# Altium PCB board.PcbDoc
Units mil, origin at the board's own origin, x right, y up, seen from the top; angles counter-clockwise.
Board outline 2755.91 x 2362.2 mil, 2 copper layers (Top Layer, Bottom Layer); 91 components, 155 nets, 498 pads, 238 vias.
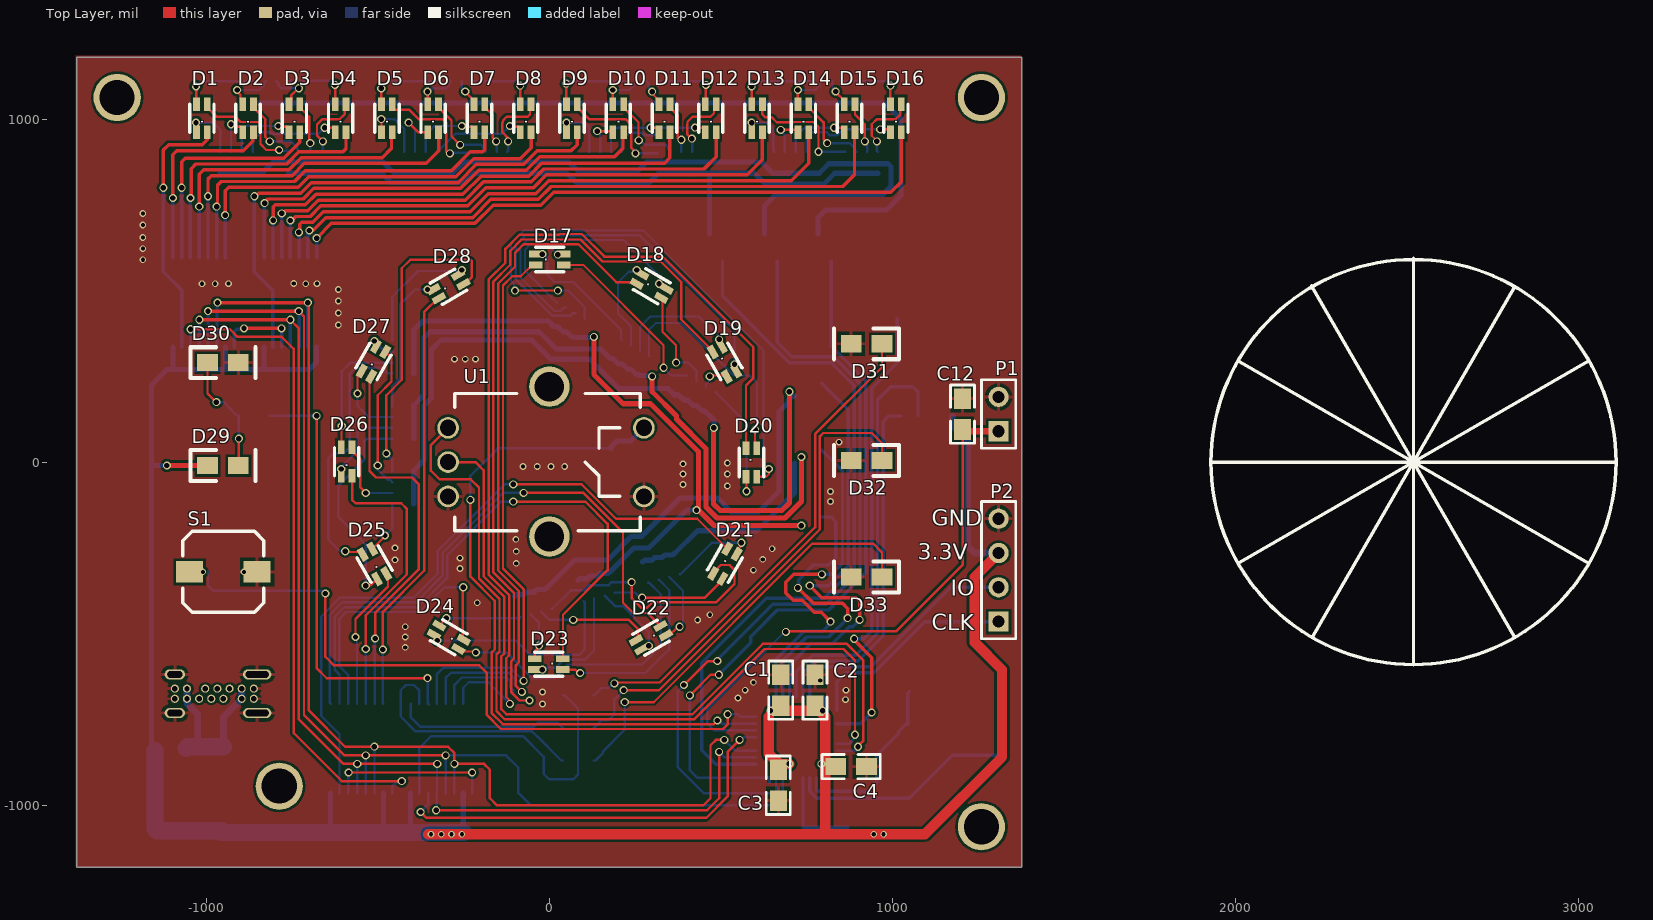
[diagram p0: Top Layer view]
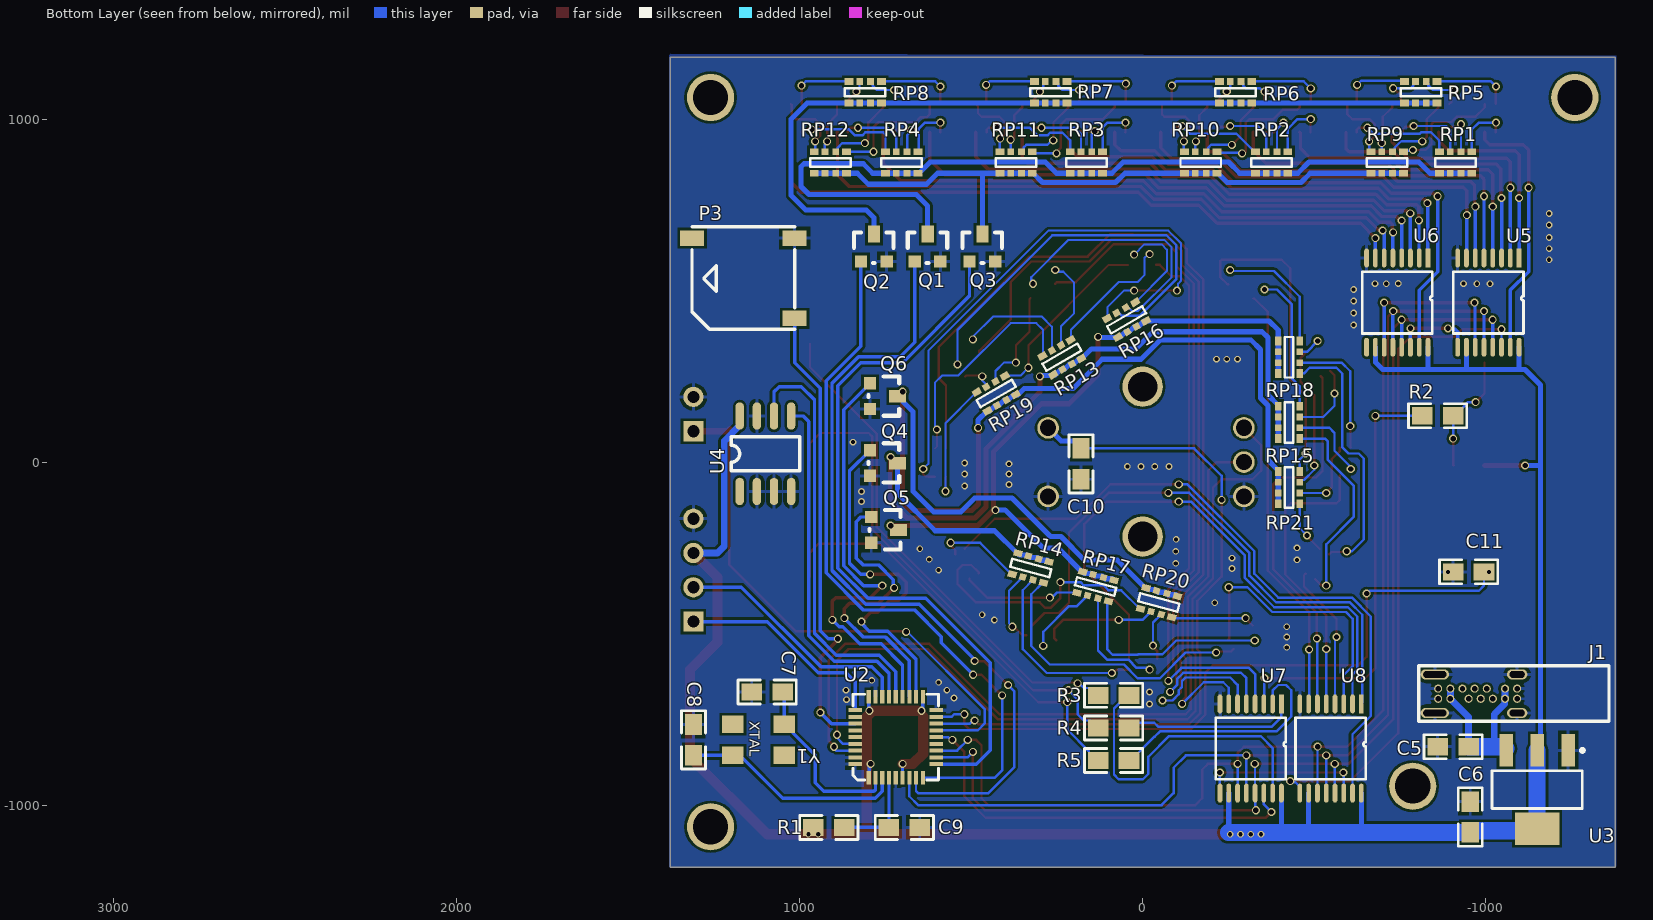
[diagram p1: Bottom Layer view, seen from below]

## Layer stack, top to bottom
Top Solder: solder mask 0.4, Solder Resist, Dk 3.5
Top Layer: signal copper 1.4
Dielectric 1: dielectric 12.6, FR-4, Dk 4.8
Bottom Layer: signal copper 1.4
Bottom Solder: solder mask 0.4, Solder Resist, Dk 3.5

## Board outline
-1377.95,-1181.1 -1377.95,1181.1 1377.95,1181.1 1377.95,-1181.1

## Design rules (kind name [scope] priority, off if disabled: settings)
Clearance [All] p1: gap=7 ignorepadtopadclearanceinfootprint=FALSE
ComponentClearance [All] p1: gap=0 collisioncheckmode=3 verticalgap=0 showdistances=FALSE
PlaneConnect [All] p1: pad.planeconnectstyle=Relief pad.reliefexpansion=20 pad.reliefentries=4 pad.reliefconductorwidth=10 pad.reliefairgap=10 via.planeconnectstyle=Direct via.reliefexpansion=20 via.reliefentries=4 via.reliefconductorwidth=10 via.reliefairgap=10
PolygonConnect [All] p1: thpad.connectstyle=Relief thpad.reliefconductorwidth=10 thpad.reliefentries=4 thpad.polygonreliefangle="90 Angle" thpad.airgapwidth=10 smdpad.connectstyle=Relief smdpad.reliefconductorwidth=10 smdpad.reliefentries=4 smdpad.polygonreliefangle="90 Angle" smdpad.airgapwidth=10 via.connectstyle=Direct via.reliefconductorwidth=10 via.reliefentries=4 via.polygonreliefangle="90 Angle" via.airgapwidth=10
RoutingVias [All] p1: holewidth=15.75 width=23.62 viastyle="Through Hole" minholewidth=15.75 minwidth=23.62 maxholewidth=157.48 maxwidth=236.22
SolderMaskExpansion [All] p1: expansion=4
Width [All] p1: maxlimit=100 minlimit=5 preferedwidth=6
28 further rules are at their usual default settings.

## Components (designator, comment, footprint, x,y, rotation, side; value= is the part's Value field where it differs from the comment)
C1 "Cap" 0805 675,-620 r270 top value=104
C2 "Cap" 0805 774.68,-620 r270 top value=104
C3 "Cap" 0805 667.82,-987.18 r90 top value=104
C4 "Cap" 0805 925,-887.83 r180 top value=104
C5 "Cap" 0805 -860,-829.68 r180 bottom value=104
C6 "Cap" 0805 -955,-989.68 r270 bottom value=104
C7 "Cap" 0805 1140,-670 r180 bottom value=22
C8 "Cap" 0805 1310,-765 r270 bottom value=22
C9 "Cap" 0805 650,-1065 r0 bottom value=104
C10 "Cap" 0805 180,-50 r90 bottom value=104
C11 "Cap" 0805 -905,-320 r180 bottom value=104
C12 "Cap" 0805 1205,185 r270 top value=104
D1 "RGB_LED" 0805_RGB -1028.79,961.38 r90 top
D2 "RGB_LED" 0805_RGB -893.89,961.38 r90 top
D3 "RGB_LED" 0805_RGB -758.99,961.38 r90 top
D4 "RGB_LED" 0805_RGB -624.09,961.38 r90 top
D5 "RGB_LED" 0805_RGB -489.19,961.38 r90 top
D6 "RGB_LED" 0805_RGB -354.29,961.38 r90 top
D7 "RGB_LED" 0805_RGB -219.39,961.38 r90 top
D8 "RGB_LED" 0805_RGB -84.49,961.38 r90 top
D9 "RGB_LED" 0805_RGB 50.41,961.38 r90 top
D10 "RGB_LED" 0805_RGB 185.31,961.38 r90 top
D11 "RGB_LED" 0805_RGB 320.21,961.38 r90 top
D12 "RGB_LED" 0805_RGB 455.11,961.38 r90 top
D13 "RGB_LED" 0805_RGB 590.01,961.38 r90 top
D14 "RGB_LED" 0805_RGB 724.91,961.38 r90 top
D15 "RGB_LED" 0805_RGB 859.81,961.38 r90 top
D16 "RGB_LED" 0805_RGB 994.71,961.38 r90 top
D17 "RGB_LED" 0805_RGB -40,606.5 r0 top
D18 "RGB_LED" 0805_RGB 270.75,547.28 r330 top
D19 "RGB_LED" 0805_RGB 503.66,336.6 r300 top
D20 "RGB_LED" 0805_RGB 605,40 r270 top
D21 "RGB_LED" 0805_RGB 546.34,-268.4 r240 top
D22 "RGB_LED" 0805_RGB 340,-505 r210 top
D23 "RGB_LED" 0805_RGB 40,-605 r180 top
D24 "RGB_LED" 0805_RGB -265,-545 r150 top
D25 "RGB_LED" 0805_RGB -502.28,-340.75 r120 top
D26 "RGB_LED" 0805_RGB -606.5,-40 r90 top
D27 "RGB_LED" 0805_RGB -546.6,265.75 r60 top
D28 "RGB_LED" 0805_RGB -337.35,504.44 r30 top
D29 "X1" 0805_LED -996.5,-10 r0 top
D30 "X5" 0805_LED -996.5,290 r0 top
D31 "Hour" 0805_LED 970,345 r180 top
D32 "Minute" 0805_LED 970,5 r180 top
D33 "Second" 0805_LED 970,-335 r180 top
J1 "USBC_Basic" USBC_BS -851.57,-731.54 r90 bottom
P1 "TopButton" HDR1X2 1310,90 r90 top
P2 "SWD" HDR1X4 1310,-465 r90 top
P3 "Buzzer" BUZZER_SMT 1015,418.8 r0 bottom
Q1 "AO3400" SOT-23 665,585 r180 bottom
Q2 "AO3400" SOT-23 821.55,585 r180 bottom
Q3 "AO3400" SOT-23 505,585 r180 bottom
Q4 "AO3400" SOT-23 795,35 r270 bottom
Q5 "AO3400" SOT-23 791.57,-160 r270 bottom
Q6 "AO3400" SOT-23 795,230 r270 bottom
R1 "Res1" 0805 870,-1065 r0 bottom value=10K
R2 "Res1" 0805 -815,135 r180 bottom value=1K
R3 "Res1" 0805 40,-680 r0 bottom value=1K
R4 "Res1" 0805 40,-775 r0 bottom value=1K
R5 "Res1" 0805 40,-870 r0 bottom value=1K
RP1 "1K*4" 0603x4 -959.49,842.01 r0 bottom
RP2 "1K*4" 0603x4 -422.99,842.01 r0 bottom
RP3 "1K*4" 0603x4 117.01,842.01 r0 bottom
RP4 "1K*4" 0603x4 655.51,842.01 r0 bottom
RP5 "1K*4" 0603x4 -857.99,1047.01 r0 bottom
RP6 "1K*4" 0603x4 -317.99,1047.01 r0 bottom
RP7 "1K*4" 0603x4 221.16,1047.01 r0 bottom
RP8 "1K*4" 0603x4 762.01,1047.01 r0 bottom
RP9 "1K*4" 0603x4 -760,842.01 r0 bottom
RP10 "1K*4" 0603x4 -216.5,842.01 r0 bottom
RP11 "1K*4" 0603x4 322.01,842.01 r0 bottom
RP12 "1K*4" 0603x4 863.5,842.01 r0 bottom
RP13 "1K*4" 0603X4 178.95,301.94 r330 bottom
RP14 "1K*4" 0603X4 363.96,-266 r195 bottom
RP15 "1K*4" 0603X4 -394.96,68.5 r90 bottom
RP16 "1K*4" 0603X4 -9.55,411.5 r330 bottom
RP17 "1K*4" 0603X4 175,-320 r195 bottom
RP18 "1K*4" 0603X4 -395,258.5 r90 bottom
RP19 "1K*4" 0603X4 370.45,196.5 r330 bottom
RP20 "1K*4" 0603X4 -9.58,-366.85 r195 bottom
RP21 "1K*4" 0603X4 -395,-121.5 r90 bottom
S1 "SW-PB" SW_PB_665 -950,-320 r0 top
U1 "EC11" EC11 -295,100 r0 top locked
U2 "STM32F103T8U6" QFN36 798.74,-912.91 r90 bottom
U3 "1117" SOT-223 -1150,-954.68 r270 bottom
U4 "AT24C04C" SO-08 1175,-85.56 r90 bottom
U5 "74HC595" TSSOP16 -1097.36,595 r270 bottom
U6 "74HC595" TSSOP16 -831.77,595 r270 bottom
U7 "74HC595" TSSOP16 -404.45,-705 r270 bottom
U8 "74HC595" TSSOP16 -637.36,-705 r270 bottom
Y1 "XTAL" XTAL-5 1045.39,-855 r0 bottom

## Footprints (in the part's own frame and the unit in brackets; to place one, negate y for a bottom-side part, rotate by r counter-clockwise, add the part's x,y. Pads: shape width x height; smd on the part's side, far side on the other; paste and mask are expansions set on the pad)
0603x4 [mm]
  rect 0.65x0.5 smd: 1(0,0) 4(2.4,0) 5(2.4,-1.6) 8(0,-1.6)
  rect 0.5x0.5 smd: 2(0.8,0) 3(1.6,0) 6(1.6,-1.6) 7(0.8,-1.6)
  silkscreen extent -0.3,-1.1 2.7,-0.5
0603X4 [mm]
  rect 0.65x0.5 smd: 1(0,0) 4(2.4,0) 5(2.4,-1.6) 8(0,-1.6)
  rect 0.5x0.5 smd: 2(0.8,0) 3(1.6,0) 6(1.6,-1.6) 7(0.8,-1.6)
  silkscreen extent -0.3,-1.1 2.7,-0.5
0805 [mil]
  rect 60x50 smd: 1(0,0) 2(90,0)
  silkscreen extent -40,-35 130,35
0805_LED [mil]
  rect 60x50 smd: 1(0,0) 2(90,0)
  silkscreen extent -50,-45 140,45
0805_RGB [mm]
  rect 1x0.5 smd: B(2.1,-0.8) COM(0,-0.8) G(2.1,0) R(0,0)
  silkscreen extent 0,-1.3 2.1,0.5
BUZZER_SMT [mm] "Surface-mount buzzer with sound port on the side"
  rect 1.78x1.15 smd: 0(7.59,-5.95) 1(0,0) 2(0,-5.95)
  silkscreen extent 0,-6.8 7.6,0.8
EC11 [mm]
  round 3 hole 2.2: 0(7.5,-8.05) 0(7.5,3.05)
  round 1.6 hole 1.2: 1(0,0) 2(0,-2.54) 3(0,-5.08) 4(14.5,0) 5(14.5,-5.08)
  silkscreen extent 0.51,-7.62 14.22,2.54
HDR1X2 [mm] "Connector; Header; 2 Position"
  rect 1.5x1.5 hole 0.9: 1(0,0)
  round 1.5 hole 0.9: 2(2.54,0)
  silkscreen extent -1.27,-1.27 3.81,1.27
HDR1X4 [mm] "Connector; Header; 4 Position"
  rect 1.5x1.5 hole 0.9: 1(0,0)
  round 1.5 hole 0.9: 2(2.54,0) 3(5.08,0) 4(7.62,0)
  silkscreen extent -1.27,-1.27 8.89,1.27
QFN36 [mm]
  rect 1x0.3 smd: 1(-0.18,0) 2(-0.18,-0.5) 3(-0.18,-1) 4(-0.18,-1.5) 5(-0.18,-2) 6(-0.18,-2.5) 7(-0.18,-3) 8(-0.18,-3.5) 9(-0.18,-4) 19(5.82,-4) 20(5.82,-3.5) 21(5.82,-3) 22(5.82,-2.5) 23(5.82,-2) 24(5.82,-1.5) 25(5.82,-1) 26(5.82,-0.5) 27(5.82,0)
  rect 0.3x1 smd: 10(0.82,-5) 11(1.32,-5) 12(1.82,-5) 13(2.32,-5) 14(2.82,-5) 15(3.32,-5) 16(3.82,-5) 17(4.32,-5) 18(4.82,-5) 28(4.82,1) 29(4.32,1) 30(3.82,1) 31(3.32,1) 32(2.82,1) 33(2.32,1) 34(1.82,1) 35(1.32,1) 36(0.82,1)
  silkscreen extent -0.35,-5.17 5.99,1.17
SO-08 [mil]
  oval 80x24 smd: 1(0,0) 2(0,-50) 3(0,-100) 4(0,-150) 5(220,-150) 6(220,-100) 7(220,-50) 8(220,0)
  silkscreen extent 60,-175 160,25
SOT-23 [mil]
  rect 36x36 smd: 1(0,0) 2(75,0)
  rect 36x50 smd: 3(38,80)
  silkscreen extent -20,-5 95,85
SOT-223 [mm] "SOT223, 4-Leads, Body 6.5x3.5mm, Pitch 2.3mm, Lead Span 7mm, IPC Medium Density"
  rect 2.4x1 smd: 1(-2.9,2.3) 2(-2.9,0) 3(-2.9,-2.3)
  rect 2.4x3.3 smd: 2(2.9,0)
  silkscreen extent -3.02,-3.35 1.4,3.47, body extent -1.85,-3.35 1.85,3.35, height 1.7
SW_PB_665 [mm]
  rect 2x1.6 smd: 1(-2.5,0) 2(2.5,0)
  silkscreen extent -3,-3 3,3
TSSOP16 [mm]
  rect 1.4x0.35 smd: 1(0,0)
  oval 1.4x0.35 smd: 2(0,-0.65) 3(0,-1.3) 4(0,-1.95) 5(0,-2.6) 6(0,-3.25) 7(0,-3.9) 8(0,-4.55) 9(6.604,-4.55) 10(6.604,-3.9) 11(6.604,-3.25) 12(6.604,-2.6) 13(6.604,-1.95) 14(6.604,-1.3) 15(6.604,-0.65) 16(6.604,0)
  silkscreen extent 1.02,-4.88 5.59,0.33
USBC_BS [mm] "USB Type-C QCharge Side-Mount"
  oval 0.75x1.5 hole 0.5 slot 1.1 at 90 deg: 0(0,-6.1) 0(2.86,-6.1)
  oval 0.75x2.1 hole 0.5 slot 1.7 at 90 deg: 0(0,0) 0(2.86,0)
  round 0.6 hole 0.4: A1(1.805,-0.25) A4(1.805,-1.15) A5(1.805,-2.05) A6(1.805,-2.95) A7(1.805,-3.85) A9(1.805,-5.2) A12(1.805,-6.1) B1(1.055,-6.1) B4(1.055,-5.2) B5(1.055,-4.3) B6(1.055,-3.4) B7(1.055,-2.5) B9(1.055,-1.15) B12(1.055,-0.25)
  silkscreen extent -0.6,-12.9 3.5,1.2
XTAL-5 [mm]
  rect 1.6x1.3 smd: 1(0,-2.3) 2(3.8,0) 3(0,0) 4(3.8,-2.3)

## Part data
C1 C2 C3 C4 C5 C6 C7 C8 C9 C10 C11 C12: "Capacitor", LatestRevisionDate=17-Jul-2002, LatestRevisionNote="Re-released for DXP Platform.", PackageDescription="Radial Cap, Thru-Hole; 2 Leads; 0.3 in Pin Spacing", PackageReference=RAD-0.3, Published=8-Jun-2000, Publisher="Altium Limited"
D1 D2 D3 D4 D5 D6 D7 D8 D9 D10 D11 D12 D13 D14 D15 D16 D17 D18 D19 D20 D21 D22 D23 D24 D25 D26 D27 D28: library part RGBLED
D29 D30 D31 D32 D33: library part LED0, "Typical INFRARED GaAs LED", LatestRevisionDate=08-Jul-2005, LatestRevisionNote="Mech Layer 1 removed.", PackageDescription="LED; 2 Leads", PackageReference=LED-0, Published=8-Jun-2000, Publisher="Altium Limited"
J1: library part USB-C_BASIC
P1 P3: library part "Header 2", "Header, 2-Pin", LatestRevisionDate=17-Jul-2002, LatestRevisionNote="Re-released for DXP Platform.", Publisher="Altium Limited"
P2: library part "Header 4", "Header, 4-Pin", LatestRevisionDate=17-Jul-2002, LatestRevisionNote="Re-released for DXP Platform.", Publisher="Altium Limited"
Q1 Q2 Q3 Q4 Q5 Q6: "N-Channel MOSFET", Published=8-Jun-2000, Publisher="Altium Limited", Revision="July-2002: Re-released for DXP Platform."
R1 R2 R3 R4 R5: "Resistor", LatestRevisionDate=17-Jul-2002, LatestRevisionNote="Re-released for DXP Platform.", PackageDescription="Axial Device, Thru-Hole; 2 Leads; 0.3 in Pin Spacing", PackageReference=AXIAL-0.3, Published=8-Jun-2000, Publisher="Altium Limited"
RP1 RP2 RP3 RP4 RP5 RP6 RP7 RP8 RP9 RP10 RP11 RP12 RP13 RP14 RP15 RP16 RP17 RP18 RP19 RP20 RP21: library part RPack_4
S1: "Switch", LatestRevisionDate=17-Jul-2002, LatestRevisionNote="Re-released for DXP Platform.", PackageDescription="Switch; 2 Leads", PackageReference=SPST-2, Published=24-Mar-1999, Publisher="Altium Limited"
U1: "Encoder with SW-PB"
U2: "STM32 ARM-based 32-bit MCU with 64 Kbytes Flash, 36-pin VFQFPN, Industrial Temperature"
U3: library part 1117_3.3, "5V-3.3V Voltage Regulator"
U5 U6 U7 U8: "8-bit serial-in, serial or parallel-out shift register with output latches; 3-state"
Y1: "Crystal Oscillator", LatestRevisionDate=17-Jul-2002, LatestRevisionNote="Re-released for DXP Platform.", PackageDescription="Crystal, Thru-Hole; 2 Leads; Body 3.1 x 8.2 mm (Dia.xH)", PackageReference=R38, Published=8-Jun-2000, Publisher="Altium Limited"

## Free pads (board coordinates)
  round 137.8 hole 102.36: 0(-1259.84,1062.99) 0(-787.4,-944.88) 0(1259.84,-1062.99) 0(1259.84,1062.99)

## Via types
v1: diameter 23.62, hole 15.75, Top Layer to Bottom Layer, 175 vias
v2: diameter 19.68, hole 11.81, Top Layer to Bottom Layer, 63 vias

## Nets (pads, with @x,y where several pads share a name; then routed paths per layer and width w, separated by ;. In a path a pad name is that pad's centre, name@x,y a point inside that pad or via, vN(x,y) a via of type N, cw(c..) or ccw(c..) an arc to the next point about the centre after c; other vN are vias at no path point)
BUZ: P3.1 U2.30 | length 1352.7
  Top Layer w10: v1@887,-517 940,-570 v1(940,-730)
  Bottom Layer w10: U2.30 907.48,-762.52 v1(940,-730) ; v1(889,-515) 916.92,-515 940,-491.92 940,215 1015,290 P3.1
ENC_A: U1.1 U2.33 | length 2427.6
  Top Layer w7: U1.1 -345,50 -345,-25 -320,-50 -229.39,-50 -205,-74.39 -205,-338.99 -145,-398.99 -145,-551.75 -154,-560.75 -154,-725.8 -129.8,-750 422.2,-750 627.2,-545 858.31,-545 891.31,-578 v1(891.31,-795)
  Bottom Layer w7: U2.33 873.43,-821.57 892.75,-802.25 892.75,-796.45 v1(891.31,-795)
ENC_B: U1.2 U2.34 | length 2332.6
  Top Layer w7: U1.2 -215,0 -191,-24 -191,-333.2 -131,-393.2 -131,-557.55 -140,-566.55 -140,-720 -125,-735 417.4,-735 622.4,-530 868,-530 915,-577 915,-813.45 900,-828.45 v1(900,-830)
  Bottom Layer w7: U2.34 893.43,-841.26 900,-834.68 v1(900,-830)
ENC_KEY: C10.2 U1.4 U2.16 | length 2082.4
  Top Layer w7: v1(-229.83,-110) -229.83,-333.96 -159,-404.79 -159,-545.95 -168,-554.95 -168,-731.6 -135.6,-764 479.5,-764 v1(490,-753.5)
  Bottom Layer w7: v1(-229.83,-110) -229.83,-39.83 -150,40 C10.2 ; v1(490,-753.5) 494.5,-753.5 503.52,-762.52 U2.16
  Bottom Layer w15: C10.2 180,44.32 197.5,61.82 237.68,61.82 U1.4
GND: C1.1 C2.1 C3.1 C4.1 C5.1 C6.1 C7.1 C8.1 C9.1 C10.1 C11.1 C12.1 D30.2 D31.2 D32.2 D33.2 J1.0 J1.A1 J1.A12 J1.B1 J1.B12 P1.2 P2.4 P3.2 Q1.2 Q2.2 Q3.2 Q4.2 Q5.2 Q6.2 S1.2 U1.3 U1.5 U2.5 U2.18 U2.26 U2.35 U2.36 U3.1 U4.2 U4.3 U4.4 U4.7 U5.8 U6.8 U7.8 U8.8
  other v2: -20,-705 863.5,-692.66 550,-687.66 -20,-670 571.09,-665 865,-665 595,-642 790,-636.21 -420,-540 -420,-510 -420,-480 432.76,-460 467.99,-445 -210,-410 -890,-320 595,-315 -260,-310 -96.25,-295 -450,-285 622.4,-283.42 -260,-280 -96.25,-260 650,-252.65 -450,-250 -97.66,-225 820,-115 819.7,-85.56 518.97,-70 390,-65 390,-35 518.97,-35 -76.3,-12.69 -35,-12.69 5,-12.69 45,-12.69 390,-5 519.06,-2.28 845,58 -276.5,300 -245,300 -215,300 -615,400 -615,435 -615,470 -615,503.37 -1012.28,520 -974.14,520 -935.46,520.19 -710,520 -676.9,520.19 -745,521.09 -1185,590 -1185,622.26 -1185.04,655 -1185.04,691.02 -1185.04,725
LED_B: Q6.1 U2.22 | length 1271.2
  Top Layer w10: v1(759.37,-360) 760,-360 795,-395 895,-395 905,-405 v1(905,-460)
  Bottom Layer w10: U2.22 700.32,-591.69 762.01,-530 825,-530 875,-480 885,-480 v1(905,-460) ; v1(759.37,-360) 814.04,-360 872,-302.04 872,153 Q6.1
LED_G: Q5.1 U2.21 | length 857.4
  Top Layer w10: v1(725,-366.63) 770.37,-412 855,-412 870,-427 v1(870,-455)
  Bottom Layer w10: U2.21 680.63,-579.37 750,-510 815,-510 v1(870,-455) ; v1(725,-366.63) 727.61,-364.03 727.61,-342.39 770,-300 815,-300 835,-280 835,-173.45 821.55,-160 Q5.1
LED_R: Q4.1 U2.20 | length 1055.1
  Top Layer w10: v1(795,-327.4) 712.6,-327.4 690,-350 690,-381.6 711.47,-403.07 737.39,-403.07 772.5,-438.17 793.17,-438.17 v1(820,-465)
  Bottom Layer w10: U2.20 660.95,-575.01 742.96,-493 797,-493 820,-470 v1(820,-465) ; v1(795,-327.4) 822.6,-327.4 855,-295 855,-25 Q4.1
LEDHOUR: R3.1 U7.15 | length 947.5
  Bottom Layer w7: U7.15 -378.86,-833.86 -344,-799 -76.31,-799 -15.9,-859.41 -15.9,-909.1 0,-925 70,-925 83.73,-911.27 83.73,-718.73 45,-680 R3.1
LEDMIN: R4.1 U7.1 | length 504.9
  Bottom Layer w7: U7.1 -404.45,-743.07 -376.52,-771 -44.51,-771 -33.51,-760 25,-760 R4.1
LEDMUL: R2.1 U7.3 | length 1285.4
  Top Layer w7: v1(-678.23,135) -678.23,-600.71 -648.94,-630 v1(-355,-630)
  Bottom Layer w7: R2.1 v1(-678.23,135) ; v1(-355,-630) -354.13,-630.87 -354.13,-704.13 U7.3 U7.3@-351.97,-706.3
LEDSEC: R5.1 U7.2 | length 709
  Bottom Layer w7: U7.2 -378.86,-666.14 -395,-650 -417.94,-650 -433.18,-665.24 -433.18,-741.82 -390,-785 -50.31,-785 -35,-800.31 -34.69,-800.31 35,-870 R5.1
MBUTTON: C12.2 P1.1 U2.15 | length 1613.1
  Top Layer w7: v1(690,-495) 692.31,-492.69 1012.31,-492.69 1205,-300 C12.2
  Top Layer w20: C12.2 1210,90 P1.1
  Bottom Layer w7: U2.15 481.2,-782.2 460.87,-761.87 460.87,-720.13 688,-493 v1(690,-495)
MOSI: U2.14 U7.14 | length 1228.2
  Top Layer w7: v1(-375,-1020) -357.69,-1037.31 457.49,-1037.31 520,-974.8 520,-845 v1@551.82,-813.18 ; v1@551.82,-819.73 v1@551.82,-813.18 ; v1(555,-810) v1@551.82,-813.18
  Bottom Layer w7: v1(-375,-1020) -353.27,-998.27 U7.14 ; v1(555,-810) 559.5,-810 567.61,-801.89 U2.14
MULSEL: C11.2 S1.1 U2.17 | length 2028.3
  Top Layer w7: v1(-652.64,-383.15) -652.64,-567.36 -627.38,-592.62 -204.38,-592.62 -182,-615 -182,-737.4 -141.4,-778 507,-778 520,-765 v1(520,-735)
  Bottom Layer w7: C11.2 -995,-360 -980,-375 -660.79,-375 v1(-652.64,-383.15) ; v1(520,-735) 550,-735 557.83,-742.83 U2.17
  other v2: -1010,-320
NetD1_B: D1.B RP9.8 | length 334.8
  Top Layer w7: D1.B -997.3,1034.21 -970.39,1007.31 -915.98,1007.31 -900.23,991.56 -848.2,991.56 -842.05,985.41 -842.05,927.05 -825,910 v1(-787.56,910)
  Bottom Layer w7: v1(-787.56,910) -785.06,907.5 -762.5,907.5 RP9.8
NetD1_G: D1.G RP5.8 | length 229.7
  Top Layer w7: v1(-1030,1095) -1029.4,1094.4 -1029.4,1044.66 D1.G
  Bottom Layer w7: v1(-1030,1095) -1015,1110 RP5.8
NetD1_R: D1.R RP1.8 | length 172.6
  Top Layer w7: v1(-1030,990) -1029.4,989.4 -1029.4,961.98 D1.R
  Bottom Layer w7: v1(-1030,990) -980,990 -959.49,969.49 RP1.8
NetD2_B: D2.B RP9.7 | length 231.1
  Top Layer w7: D2.B -862.4,1034.21 -828.05,999.87 -828.05,948.05 v1(-815,935)
  Bottom Layer w7: v1(-815,935) -752.51,935 -734.85,917.33 -734.85,911.34 RP9.7
NetD2_G: D2.G RP5.7 | length 145
  Top Layer w7: v1(-910,1085) -910,1080.5 -900.23,1070.74 -900.23,1050.4 D2.G
  Bottom Layer w7: v1(-910,1085) -845.51,1085 -832.84,1097.67 -832.84,1103.66 RP5.7
NetD2_R: D2.R RP1.7 | length 129.7
  Top Layer w7: v1(-927.99,985) -923.49,985 -916.06,977.56 -900.23,977.56 -893.89,971.22 D2.R
  Bottom Layer w7: RP1.7 v1(-927.99,985)
NetD3_B: D3.B RP9.6 | length 151.7
  Top Layer w7: D3.B -727.5,1034.21 -700,1006.72 -700,935 -697.01,932.01 v1(-697.01,930)
  Bottom Layer w7: RP9.6 v1(-697.01,930)
NetD3_G: D3.G RP5.6 | length 135.9
  Top Layer w7: D3.G -752.65,1050.4 -752.65,1068.9 -731.55,1090 v1(-730,1090)
  Bottom Layer w7: RP5.6 -788.66,1103.66 -788.66,1097.67 -780.65,1089.66 -730.34,1089.66 v1(-730,1090)
NetD3_R: D3.R RP1.6 | length 219.2
  Top Layer w7: v1(-790,980) -787.56,977.56 -765.33,977.56 -758.99,971.22 D3.R
  Bottom Layer w7: RP1.6 -896.5,968.5 -885,980 v1(-790,980)
NetD4_B: D4.B RP9.5 | length 213.4
  Top Layer w7: v1(-660,935) -677.31,952.31 -677.31,984.24 -661.55,1000 -610.75,1000 -596.88,1013.87 -596.88,1039.77 D4.B
  Bottom Layer w7: RP9.5 -660,910.51 v1(-660,935)
NetD4_G: D4.G RP5.5 | length 200.9
  Top Layer w7: v1(-625,1100) -624.55,1099.55 -624.55,1044.51 D4.G
  Bottom Layer w7: RP5.5 -761.19,1112.31 -637.31,1112.31 v1(-625,1100)
NetD4_R: D4.R RP1.5 | length 302.1
  Top Layer w7: v1(-655,975) -630.43,975 -624.09,968.66 D4.R
  Bottom Layer w7: RP1.5 -865,937 -840,962 -812.53,962 -808.22,957.69 -672.31,957.69 v1(-655,975)
NetD5_B: D5.B RP10.8 | length 358.7
  Top Layer w7: D5.B -457.7,1034.21 -451.35,1027.87 -408.68,1027.87 -380,999.19 -309.8,999.19 -300,989.4 -300,904.1 -299.08,903.18 -293.18,903.18 v1(-290,900)
  Bottom Layer w7: v1(-290,900) -287.5,902.5 -219,902.5 RP10.8
NetD5_G: D5.G RP6.8 | length 226.4
  Top Layer w7: v1(-490,1089.66) -489.6,1089.25 -489.6,1044.46 D5.G
  Bottom Layer w7: v1(-490,1089.66) -469.66,1110 RP6.8
NetD5_R: D5.R RP2.8 | length 184.2
  Top Layer w7: v1(-490,1000) -489.19,999.19 D5.R
  Bottom Layer w7: v1(-490,1000) -451.55,1000 -422.99,971.44 RP2.8
NetD6_B: D6.B RP10.7 | length 232.1
  Top Layer w7: D6.B -322.8,1034.21 -285,996.42 -285,950 v1(-260,925)
  Bottom Layer w7: v1(-260,925) -259.66,925.34 -199.35,925.34 -191.34,917.33 -191.34,911.34 RP10.7
NetD6_G: D6.G RP6.7 | length 120.7
  Top Layer w7: v1(-355,1080) -354.29,1079.29 D6.G
  Bottom Layer w7: v1(-355,1080) -351.43,1080 -341.77,1089.66 -300.85,1089.66 -292.84,1097.67 -292.84,1103.66 RP6.7
NetD6_R: D6.R RP2.7 | length 160.2
  Top Layer w7: v1(-410,990) -381.38,961.38 D6.R
  Bottom Layer w7: v1(-410,990) -391.5,971.5 RP2.7
NetD7_B: D7.B RP10.6 | length 153.3
  Top Layer w7: D7.B -187.89,1034.21 -165,1011.32 -165,945 v1(-155,935)
  Bottom Layer w7: v1(-155,935) -153.5,933.5 RP10.6
NetD7_G: D7.G RP6.6 | length 81
  Top Layer w7: v1(-245,1080.5) -245,1079.51 -219.39,1053.9 D7.G
  Bottom Layer w7: RP6.6 -254.66,1109.66 -254.66,1089.66 -245.5,1080.5 v1(-245,1080.5)
NetD7_R: D7.R RP2.6 | length 214.4
  Top Layer w7: v1(-254.92,980) -252.48,977.56 -225.73,977.56 -219.39,971.22 D7.R
  Bottom Layer w7: RP2.6 -360,955 -335,980 v1(-254.92,980)
NetD8_B: D8.B RP10.5 | length 218
  Top Layer w7: v1(-120,935) -120,945 -137.31,962.31 -137.31,989.24 -135,991.55 -135,996.42 -124.7,1006.72 -63.28,1006.72 -56.13,1013.87 -56.13,1040.92 D8.B
  Bottom Layer w7: RP10.5 -120,907.01 v1(-120,935)
NetD8_G: D8.G RP6.5 | length 197.4
  Top Layer w7: v1(-85,1097.67) -84.75,1097.41 -84.75,1044.31 D8.G
  Bottom Layer w7: RP6.5 -97.33,1110 v1(-85,1097.67)
NetD8_R: D8.R RP2.5 | length 288.6
  Top Layer w7: v1(-115,980) -112.56,977.56 -90.83,977.56 -84.49,971.22 D8.R
  Bottom Layer w7: RP2.5 -325.55,905 -272.86,957.69 -137.31,957.69 v1(-115,980)
NetD9_B: D9.B RP11.8 | length 341.6
  Top Layer w7: D9.B 81.91,1034.21 116.25,999.87 222.69,999.87 238.47,984.09 238.47,917.51 251.49,904.5 v1(251.49,900)
  Bottom Layer w7: v1(251.49,900) RP11.8@316.49,900
NetD9_G: D9.G RP7.8 | length 234.7
  Top Layer w7: v1(49.22,1103.66) 49.81,1103.06 49.81,1044.65 D9.G
  Bottom Layer w7: v1(49.22,1103.66) 55.56,1110 RP7.8
NetD9_R: D9.R RP3.8 | length 171.9
  Top Layer w7: v1(50.22,990) 50.32,989.91 50.32,961.47 D9.R
  Bottom Layer w7: v1(50.22,990) 102.3,990 117.01,975.29 RP3.8
NetD10_B: D10.B RP11.7 | length 234.2
  Top Layer w7: D10.B 216.81,1034.21 260,991.02 260,938.77 v1(260.78,937.99)
  Bottom Layer w7: v1(260.78,937.99) 265.28,937.99 277.93,925.34 339.15,925.34 347.16,917.33 347.16,911.34 RP11.7
NetD10_G: D10.G RP7.7 | length 122.6
  Top Layer w7: v1(185,1085) 185.15,1084.85 185.15,1044.21 D10.G
  Bottom Layer w7: v1(185,1085) 233.64,1085 246.31,1097.67 246.31,1103.66 RP7.7
NetD10_R: D10.R RP3.7 | length 110.3
  Top Layer w7: v1(140,965) 181.69,965 D10.R
  Bottom Layer w7: v1(140,965) 148.5,956.5 RP3.7
NetD11_B: D11.B RP11.6 | length 156.3
  Top Layer w7: D11.B 351.71,1034.21 375,1010.92 375,944.1 375.92,943.18 381.82,943.18 v1(385,940)
  Bottom Layer w7: RP11.6 v1(385,940)
NetD11_G: D11.G RP7.6 | length 80.9
  Top Layer w7: v1(300,1080) 303.18,1076.82 303.18,1070.93 320.21,1053.9 D11.G
  Bottom Layer w7: RP7.6 290.34,1103.81 290.34,1089.66 v1(300,1080)
NetD11_R: D11.R RP3.6 | length 209.9
  Top Layer w7: v1(295,975) 313.87,975 320.21,968.66 D11.R
  Bottom Layer w7: RP3.6 180,957.5 197.5,975 v1(295,975)
NetD12_B: D12.B RP11.5 | length 210.7
  Top Layer w7: v1(415.62,943.18) 415,943.18 402.69,955.49 402.69,984.53 402.9,984.74 402.9,992.14 417.48,1006.72 470,1006.72 480.26,1016.98 480.26,1037.71 D12.B
  Bottom Layer w7: v1(415.62,943.18) 416.5,942.31 RP11.5
NetD12_G: D12.G RP7.5 | length 201.5
  Top Layer w7: D12.G 455.8,1044.75 455.8,1099.31 v1(456.5,1100)
  Bottom Layer w7: RP7.5 446.5,1110 v1(456.5,1100)
NetD12_R: D12.R RP3.5 | length 308.6
  Top Layer w7: v1(425,975.29) 448.77,975.29 455.11,968.95 D12.R
  Bottom Layer w7: RP3.5 211.5,937.99 233.81,960.3 270.02,960.3 277.64,952.69 307.11,952.69 329.71,975.29 v1(425,975.29)
NetD13_B: D13.B RP12.8 | length 360.3
  Top Layer w7: D13.B 621.51,1013.49 630,1005 649.24,1005 663.27,990.97 710.12,990.97 710.72,991.56 770.6,991.56 785,977.16 v1(785,905)
  Bottom Layer w7: v1(785,905) RP12.8
NetD13_G: D13.G RP8.8 | length 229.2
  Top Layer w7: D13.G v1(590,1095)
  Bottom Layer w7: v1(590,1095) 605,1110 RP8.8
NetD13_R: D13.R RP4.8 | length 167.1
  Top Layer w7: D13.R v1(590,990)
  Bottom Layer w7: v1(590,990) 635,990 652.69,972.31 652.69,907.82 RP4.8
NetD14_B: D14.B RP12.7 | length 235.1
  Top Layer w7: D14.B 756.41,1034.21 800,990.62 800,940 v1(810,930)
  Bottom Layer w7: v1(810,930) 875.99,930 888.66,917.33 888.66,911.34 RP12.7
NetD14_G: D14.G RP8.7 | length 123.4
  Top Layer w7: D14.G 724.91,1084.91 v1(725,1085)
  Bottom Layer w7: v1(725,1085) 774.49,1085 787.16,1097.67 787.16,1103.66 RP8.7
NetD14_R: D14.R RP4.7 | length 122.1
  Top Layer w7: v1(675,968.66) 718.57,968.66 724.91,962.31 D14.R
  Bottom Layer w7: v1(675,968.66) 675,965 687.01,952.99 RP4.7
NetD15_B: D15.B RP12.6 | length 153.6
  Top Layer w7: D15.B 891.31,1013.28 920,984.59 v1(920,935)
  Bottom Layer w7: v1(920,935) 920,931.84 926.5,925.34 RP12.6
NetD15_G: D15.G RP8.6 | length 80.4
  Top Layer w7: v1(835,1080.5) 835,1078.71 859.81,1053.9 D15.G
  Bottom Layer w7: RP8.6 825.84,1109.16 825.84,1089.66 v1(835,1080.5)
NetD15_R: D15.R RP4.6 | length 206.1
  Top Layer w7: v1(830,975) 853.47,975 859.81,968.66 D15.R
  Bottom Layer w7: RP4.6 718.5,948.79 745,975.29 829.71,975.29 v1(830,975)
NetD16_B: D16.B RP12.5 | length 214.4
  Top Layer w7: v1(955,935) 955,936.55 940,951.55 940,985 955,1000 1010,1000 1023.87,1013.87 1023.87,1041.72 D16.B
  Bottom Layer w7: v1(955,935) 955,907.99 RP12.5
NetD16_G: D16.G RP8.5 | length 197.3
  Top Layer w7: D16.G 994.71,1097.38 v1(995,1097.67)
  Bottom Layer w7: RP8.5 982.67,1110 v1(995,1097.67)
NetD16_R: D16.R RP4.5 | length 313
  Top Layer w7: v1(965,970) 988.37,970 994.71,963.66 D16.R
  Bottom Layer w7: RP4.5 750,955 756.29,961.29 808.9,961.29 817.5,952.69 839.24,952.69 856.55,970 v1(965,970)
NetD17_B: D17.B RP19.8 | length 531.5
  Top Layer w6: D17.B 98.5,575 333.54,339.96 v1(333.54,275)
  Bottom Layer w6: v1(333.54,275) 356.01,252.53 400.47,252.53 RP19.8
NetD17_G: D17.G RP16.8 | length 306.7
  Bottom Layer w6: RP16.8 20.86,466.05 -70.42,557.33 -70.42,619.58 -55,635 -5,635 v1(25,605)
NetD17_R: D17.R RP13.8 | length 379.7
  Bottom Layer w6: v1(-20,606.5) -18.5,605 -15,605 -5,595 -5,545 15,525 70,525 208.97,386.03 208.97,357.97 RP13.8
NetD18_B: D18.B RP19.7 | length 306.4
  Top Layer w6: D18.B 330,475.26 330,380 370,340 v1(370,290)
  Bottom Layer w6: v1(370,290) 405,290 429.22,265.78 RP19.7
NetD18_G: D18.G RP16.7 | length 750.7
  Bottom Layer w6: RP16.7 41.42,450.3 32.25,441.13 13.87,441.13 -84.54,539.54 -84.54,625.88 -62.42,648 216.42,648 325,539.42 325,523.51 321.49,520 v1(320,520)
NetD18_R: D18.R RP13.7 | length 269.3
  Bottom Layer w6: RP13.7 237.72,396.83 200,434.55 200,523.36 231.64,555 251.49,555 255,558.51 v1(255,560)
NetD19_B: D19.B RP19.6 | length 87
  Top Layer w6: v1(467.99,250) 470.08,252.09 514.89,252.09 D19.B
  Bottom Layer w6: RP19.6 456.5,226.34 467.99,237.83 v1(467.99,250)
NetD19_G: D19.G RP16.6 | length 1185.6
  Bottom Layer w7: RP16.6 68.7,434.55 60.51,426.36 9.55,426.36 -98.04,533.95 -98.04,632.38 -68.92,661.5 263.5,661.5 540,385 v1(540,285)
NetD19_R: D19.R RP13.6 | length 344.3
  Bottom Layer w6: RP13.6 265,395 295,425 435,425 495,365 v1(495,357.97)
NetD20_B: D20.B RP19.5 | length 370.2
  Top Layer w6: D20.B 575,-44.17 v1(575,-85)
  Bottom Layer w6: RP19.5 484.85,203.8 575,113.66 v1(575,-85)
NetD20_G: D20.G RP16.5 | length 1700.7
  Top Layer w6: v1(-100,500) v1(25,500) ; D20.G 623.84,-42.68 625,-41.52 633.48,-41.52 640,-35 v1(640,-20)
  Bottom Layer w6: v1(-100,500) -103.37,503.37 -103.37,520.19 -111.54,528.36 -111.54,638.46 -75,675 275,675 625,325 625,-5 v1(640,-20) ; v1(25,500) 55,500 102.3,452.7 102.3,420.28 RP16.5
NetD20_R: D20.R RP13.5 | length 668.3
  Top Layer w6: v1(600,95) 600,45 D20.R
  Bottom Layer w6: RP13.5 290.8,310.73 290.8,385.8 310,405 385,405 537.47,252.53 585,252.53 605,232.53 605,98.51 601.49,95 v1(600,95)
NetD21_B: D21.B RP20.8 | length 772.6
  Top Layer w7: v1(240,-350) 240,-395.8 269.2,-425 284,-425 300,-409 486,-409 540,-355 540,-314.1 525.9,-300 500,-300 477.72,-322.28 D21.B
  Bottom Layer w7: RP20.8 8.81,-427.69 62.93,-373.57 100.03,-373.57 114.75,-358.86 172.95,-358.86 181.8,-350 v1(240,-350)
NetD21_G: D21.G RP17.8 | length 345.1
  Top Layer w7: v1(270.75,-395) 453.6,-395 505,-343.6 D21.G
  Bottom Layer w7: RP17.8 192.07,-380.08 250.08,-380.08 265,-395 v1(270.75,-395)
NetD21_R: D21.R RP14.8 | length 256.8
  Top Layer w7: D21.R 546.34,-257 556.82,-246.52 556.82,-238.18 v1(560,-235)
  Bottom Layer w7: RP14.8 382.35,-326.85 474.2,-235 v1(560,-235)
NetD22_B: D22.B RP20.7 | length 337.6
  Top Layer w7: v1(70,-460) 232.28,-460 257.57,-485.3 257.57,-514.14 D22.B
  Bottom Layer w7: RP20.7 0.46,-460 v1(70,-460)
NetD22_G: D22.G RP17.7 | length 213.9
  Bottom Layer w7: RP17.7 191.88,-420 215,-420 290,-495 v1(290,-535.87)
NetD22_R: D22.R RP14.7 | length 216.1
  Top Layer w7: D22.R 350.5,-505 375.5,-480 v1(380,-480)
  Bottom Layer w7: RP14.7 390,-375.16 390,-470 v1(380,-480)
NetD23_B: D23.B RP20.6 | length 144.7
  Top Layer w7: D23.B -42.68,-552.18 -30,-539.5 v1(-30,-535)
  Bottom Layer w7: RP20.6 -30,-468.12 v1(-30,-535)
NetD23_G: D23.G RP17.6 | length 326.3
  Bottom Layer w7: v1(-20,-605) -20,-604.1 -15.9,-600 17.72,-600 41.72,-576 104,-576 130.46,-549.54 RP17.6
NetD23_R: D23.R RP14.6 | length 557.5
  Top Layer w7: D23.R 75.5,-605 85.5,-615 v1(90,-615)
  Bottom Layer w7: v1(90,-615) 280,-615 349.84,-545.16 349.84,-373.57 RP14.6
NetD24_B: D24.B RP20.5 | length 246.7
  Top Layer w7: D24.B -300,-455.53 v1(-300,-455)
  Bottom Layer w7: v1(-300,-455) -87.39,-455 RP20.5
NetD24_G: D24.G RP17.5 | length 596.6
  Bottom Layer w7: v1(-326.77,-520) -97.68,-520 -57.68,-560 13,-560 15,-562 87.16,-562 104,-545.16 104,-409.27 RP17.5
NetD24_R: D24.R RP14.5 | length 864.9
  Top Layer w7: D24.R -257.93,-552.07 -216.74,-552.07 v1(-213.82,-555)
  Bottom Layer w7: v1(-213.82,-555) -125,-555 -50,-630 15,-630 55,-590 270.87,-590 325,-535.87 325,-385.22 291.08,-351.3 RP14.5
NetD25_B: D25.B RP21.8 | length 156.1
  Top Layer w7: D25.B -478.99,-216.05 v1(-478.99,-213.99)
  Bottom Layer w7: v1(-478.99,-213.99) -457.99,-192.99 RP21.8
NetD25_G: D25.G RP18.8 | length 784.2
  Top Layer w7: v1(-595,-260) -592.89,-262.11 -550.65,-262.11 D25.G
  Bottom Layer w7: v1(-595,-260) -610,-260 -645,-225 -645,10 -630,25 -600,25 -582.31,42.69 -582.31,257.69 -565,275 -486.5,275 -470,258.5 RP18.8
NetD25_R: D25.R RP15.8 | length 610.5
  Top Layer w7: v1(-535,-360) -533.5,-358.5 -520.03,-358.5 D25.R
  Bottom Layer w7: v1(-535,-360) -535,-240 -615,-160 -615,-68.5 -540,6.5 -540,60 -531.5,68.5 RP15.8
NetD26_B: D26.B RP21.7 | length 224.9
  Top Layer w7: D26.B@-575,41.34 -575,32.83 -550.65,8.48 -550.65,-74.1 -535,-89.75 v1(-535,-90)
  Bottom Layer w7: v1(-535,-90) RP21.7
NetD26_G: D26.G RP18.7 | length 380.3
  Top Layer w7: D26.G -605.75,43.43 -605.75,104.25 v1(-605,105)
  Bottom Layer w7: v1(-605,105) -605,265 -580,290 RP18.7
NetD26_R: D26.R RP15.7 | length 232
  Bottom Layer w7: v1(-606.5,-20) -605,-18.5 -605,-12.69 -559.1,33.21 -559.1,85 -544.1,100 RP15.7
NetD27_B: D27.B RP21.6 | length 425
  Top Layer w7: v1(-500,-10) -500,195 -460,235 -460,303.62 D27.B
  Bottom Layer w7: v1(-500,-10) -500,-22.49 -470.33,-52.16 -464.33,-52.16 RP21.6
NetD27_G: D27.G RP18.6 | length 65.1
  Bottom Layer w7: v1(-510,352.99) -478.5,321.5 RP18.6
NetD27_R: D27.R RP15.6 | length 221.5
  Top Layer w7: v1(-559.1,200) -559.1,253.25 D27.R
  Bottom Layer w7: v1(-559.1,200) -559.1,164.1 -526.5,131.5 RP15.6
NetD28_B: D28.B RP21.5 | length 913.3
  Top Layer w7: v1(-475,25) -475,195 -430,240 -430,565 -405,590 -229.83,590 -225.73,585.9 -225.73,539.57 -246.81,518.5 D28.B
  Bottom Layer w7: v1(-475,25) -457.99,7.99 RP21.5
NetD28_G: D28.G RP18.5 | length 364.3
  Bottom Layer w7: RP18.5 -457.99,482.01 -382.67,557.33 -257.67,557.33 v1(-255,560)
NetD28_R: D28.R RP15.5 | length 404.5
  Bottom Layer w7: RP15.5 -457.95,221.06 -435,244.01 -435,460 -391.63,503.37 v1(-355,503.37)
NetD29_2: D29.2 D30.1 R2.2 | length 355.2
  Top Layer w7: D30.1 -996.5,200 -971.5,175 v1(-970.39,175) ; D29.2 -905,-8.5 v1(-905,68.5)
  Bottom Layer w7: v1(-970.39,175) -948.08,175 -941.4,168.32 -941.4,166.4 -910,135 R2.2 v1(-905,68.5)
NetD31_1: D31.1 R3.2 | length 1463.7
  Top Layer w7: v1(190,-645) 192.31,-642.69 322.31,-642.69 775,-190 775,81.53 970,276.53 D31.1
  Bottom Layer w7: R3.2 151.5,-658.5 172,-658.5 185.5,-645 v1(190,-645)
NetD32_1: D32.1 R4.2 | length 1442.6
  Top Layer w7: v1(216.81,-665) 319.8,-665 789,-195.8 789,75 799,85 940,85 970,55 D32.1
  Bottom Layer w7: R4.2 151.5,-753.5 171.5,-753.5 190,-735 190,-691.81 v1(216.81,-665)
NetD33_1: D33.1 R5.2 | length 1233.7
  Top Layer w7: v1(220,-700) 304.6,-700 766.42,-238.18 945,-238.18 970,-263.18 D33.1
  Bottom Layer w7: R5.2 135,-870 156.5,-848.5 156.5,-843.5 220,-780 v1(220,-700)
NetU5_9: U5.9 U6.14 | length 241.7
  Top Layer w10: v1(-890,390) v1(-780.65,390)
  Bottom Layer w10: U5.9 -918.23,380 -910.83,387.39 -892.61,387.39 v1(-890,390) ; v1(-780.65,390) -780.59,389.94 U6.14
NetU7_9: U7.9 U8.14 | length 480.6
  Top Layer w7: v1(-585,-905) v1(-225,-905)
  Bottom Layer w7: U8.14 -586.18,-906.18 v1(-585,-905) ; U7.9 -225.16,-964.84 -225.16,-905.16 v1(-225,-905)
NRST: C9.2 R1.1 U2.4 | length 275.1
  Bottom Layer w10: U2.4 739.68,-1064.68 C9.2 R1.1
OE: U2.11 U5.13 U6.13 U7.13 U8.13 | length 3367.2
  Top Layer w7: v1(-755,415) -731,391 -731,-749 -600,-880 v1(-560,-880) v1(-326.77,-880) ; v1(-330,-1015) 460,-1015 495,-980 v1(495,-845)
  Top Layer w10: v1(-1020,415) v1(-755,415)
  Bottom Layer w7: U8.13 -560.3,-964.7 -560.3,-880.3 v1(-560,-880) ; v1(-330,-1015) -327.68,-1012.68 U7.13 -327.22,-964.55 -327.22,-880.45 v1(-326.77,-880) ; v1(495,-845) 510.94,-860.94 U2.11
  Bottom Layer w10: U5.13 -1020.3,335.3 -1020.3,414.7 v1(-1020,415) ; U6.13 v1(-755,415)
PRGBLUE: Q3.3 RP9.1 RP9.2 RP9.3 RP9.4 RP10.1 RP10.2 RP10.3 RP10.4 RP11.1 RP11.2 RP11.3 RP11.4 RP12.1 RP12.2 RP12.3 RP12.4 | length 1970.8
  Bottom Layer w15: RP9.1 RP9.2 RP9.3 RP9.4 -488.53,842.01 -461.53,815 -246.46,815 -219.45,842.01 RP10.1 RP10.2 RP10.3 RP10.4 51.97,842.01 78.98,815 292.05,815 319.06,842.01 RP11.1 RP11.2 RP11.3 RP11.4 RP11.4@419.41,842.01 ; RP11.4@421.75,839.67 RP11.4@419.41,842.01 ; Q3.3 467,839.01 470,842.01 ; RP12.4 RP12.3 RP12.2 RP12.1 832.01,842.01 800,810 630,810 597.99,842.01 470,842.01 ; RP11.4@419.41,842.01 470,842.01
PRGGRN: Q2.3 RP5.1 RP5.2 RP5.3 RP5.4 RP6.1 RP6.2 RP6.3 RP6.4 RP7.1 RP7.2 RP7.3 RP7.4 RP8.1 RP8.2 RP8.3 RP8.4 | length 2441
  Bottom Layer w15: RP5.1 RP5.2 RP5.3 RP5.4 RP6.1 RP6.2 RP6.3 RP6.4 RP7.1 RP7.2 RP7.3 RP7.4 RP8.1 RP8.2 RP8.3 RP8.4 977.99,1047.01 1025,1000 1025,777.33 982.67,735 805.94,735 783.55,712.61 Q2.3
PRGRED: Q1.3 RP1.1 RP1.2 RP1.3 RP1.4 RP2.1 RP2.2 RP2.3 RP2.4 RP3.1 RP3.2 RP3.3 RP3.4 RP4.1 RP4.2 RP4.3 RP4.4 | length 2585.7
  Bottom Layer w15: RP1.1 RP1.2 RP1.3 RP1.4 -837.99,842.01 -805,875 -485,875 -452.01,842.01 RP2.1 RP2.2 RP2.3 RP2.4 -282.99,842.01 -250,875 57.01,875 90,842.01 RP3.1 RP3.2 RP3.3 RP3.4 251.16,842.01 284.15,875 619.57,875 652.56,842.01 RP4.1 RP4.2 RP4.3 RP4.4 787.01,842.01 815,870 987.77,870 996.55,861.21 996.55,803.89 972.67,780 660,780 627,747 Q1.3
PROG0: D1.COM U5.15 | length 758.7
  Top Layer w10: v1(-1125,800) -1125,910 -1110,925 -1012.01,925 -997.3,939.71 D1.COM
  Bottom Layer w10: v1(-1125,800) -1125,555 -1071.77,501.77 U5.15
PROG1: D2.COM U5.1 | length 577.4
  Top Layer w10: v1(-1097.36,770) -1097.36,896.74 -1086.1,908 -892,908 -865,935 -865,958.77 D2.COM
  Bottom Layer w10: U5.1 v1(-1097.36,770)
PROG2: D3.COM U5.2 | length 677.7
  Top Layer w10: v1(-1071.77,800) -1071.77,876.23 -1061.81,886.19 -773.81,886.19 -727.5,932.5 D3.COM
  Bottom Layer w10: U5.2 v1(-1071.77,800)
PROG3: D4.COM U5.3 | length 784.8
  Top Layer w10: v1(-1046.18,770) -1044.19,771.99 -1044.19,855.81 -1030.81,869.19 -765.81,869.19 -730,905 -601.5,905 -592.6,913.9 D4.COM
  Bottom Layer w10: U5.3 v1(-1046.18,770)
PROG4: D5.COM U5.4 | length 883.6
  Top Layer w10: v1(-1020.59,745) -1020.59,839.41 -1007.81,852.19 -758.77,852.19 -722.96,888 -487,888 -460,915 -460,959.07 D5.COM
  Bottom Layer w10: U5.4 v1(-1020.59,745)
PROG5: D6.COM U5.5 | length 990.7
  Top Layer w10: v1(-995,775) -995,825.43 -985.24,835.19 -749.81,835.19 -714,871 -359,871 -322.8,907.2 D6.COM
  Bottom Layer w10: U5.5 v1(-995,775)
PROG6: D7.COM U5.6 | length 1086.7
  Top Layer w10: v1(-970,745) -967.39,747.61 -967.39,807.61 -956.81,818.19 -742.77,818.19 -710.96,850 -285,850 -230,905 -193.75,905 -187.89,910.86 D7.COM
  Bottom Layer w10: v1(-970,745) -969.7,744.7 -969.7,595.3 U5.6
PROG7: D8.COM U5.7 | length 1185.2
  Top Layer w10: v1(-945,720) -945,791.19 -935,801.19 -732,801.19 -701.19,832 -273,832 -220.02,884.98 -85.02,884.98 -52.99,917.01 D8.COM
  Bottom Layer w10: v1(-945,720) -944.41,719.41 -944.41,595.59 U5.7
PROG8: D9.COM U6.15 | length 1502.2
  Top Layer w10: v1(-860,775) -856.31,775 -847.12,784.19 -724.96,784.19 -694.15,815 -265.96,815 -212.98,867.98 -74.23,867.98 -35,907.2 63.3,907.2 81.91,925.81 D9.COM
  Bottom Layer w10: v1(-860,775) -860,555 -806.18,501.18 U6.15
PROG9: D10.COM U6.1 | length 1320.4
  Top Layer w10: v1(-830,755) -830,757.19 -820,767.19 -717.92,767.19 -687.11,798 -258.92,798 -205.94,850.98 -67.18,850.98 -27.96,890.2 190.2,890.2 215,915 215,959.57 D10.COM
  Bottom Layer w10: U6.1 -830.89,595.89 -830.89,754.11 v1(-830,755)
PROG10: D11.COM U6.2 | length 1440.1
  Top Layer w10: v1(-805,705) -805,744.33 -799.14,750.19 -710.88,750.19 -680.06,781 -251.88,781 -198.9,833.98 -60.14,833.98 -22.59,871.53 336.33,871.53 351.71,886.91 D11.COM
  Bottom Layer w10: U6.2 -805.59,595.59 -805.59,704.41 v1(-805,705)
PROG11: D12.COM U6.3 | length 1536.6
  Top Layer w10: v1(-780,725) -778.19,725 -770,733.19 -703.83,733.19 -673.02,764 -244.83,764 -191.85,816.98 -53.1,816.98 -15.55,854.53 451.14,854.53 486.61,890 D12.COM
  Bottom Layer w10: U6.3 -780.3,595.3 -780.3,724.7 v1(-780,725)
PROG12: D13.COM U6.4 | length 1639.1
  Top Layer w10: v1(-755,704.41) -751.31,704.41 -739.53,716.19 -696.79,716.19 -665.98,747 -237.79,747 -184.81,799.98 -46.06,799.98 -8.51,837.53 577.53,837.53 621.51,881.51 D13.COM
  Bottom Layer w10: U6.4 v1(-755,704.41)
PROG13: D14.COM U6.5 | length 1747.2
  Top Layer w10: v1(-730,670) -727.39,672.61 -727.39,693.33 -721.54,699.19 -689.75,699.19 -658.94,730 -230.75,730 -177.77,782.98 -39.02,782.98 -1.47,820.53 705.53,820.53 756.41,871.41 D14.COM
  Bottom Layer w10: v1(-730,670) -729.41,669.41 U6.5
PROG14: D15.COM U6.6 | length 1863.2
  Top Layer w10: v1(-699.38,675.38) -696.77,677.98 -686.91,677.98 -651.9,713 -223.71,713 -170.73,765.98 -31.98,765.98 5.58,803.53 856,803.53 890,837.53 890,960.07 D15.COM
  Bottom Layer w10: U6.6 -703.82,670.94 v1(-699.38,675.38)
PROG15: D16.COM U6.7 | length 1974.9
  Top Layer w10: v1(-678.23,653.06) -635.28,696 -216.67,696 -163.69,748.98 -24.93,748.98 12.62,786.53 996,786.53 1026.21,816.74 D16.COM
  Bottom Layer w10: U6.7 v1(-678.23,653.06)
PROGIN: U5.14 U8.9 | length 1924.1
  Top Layer w7: v1(-1046.18,387.39) -931,387.39 -908.61,365 -780,365 -745,330 -745,-790 -605,-930 v1(-430,-930)
  Bottom Layer w7: U5.14 v1(-1046.18,387.39) ; U8.9 -458.23,-946.17 -445.24,-933.18 -433.18,-933.18 v1(-430,-930)
PWM_B: Q3.1 U2.10 | length 2111.4
  Bottom Layer w10: Q3.1 505,485 700,290 821.55,290 889,222.55 889,-309.08 800.93,-397.15 632.85,-397.15 445,-585 445,-840 485.63,-880.63 U2.10
PWM_G: Q2.1 U2.9 | length 2094.5
  Top Layer w7: v1(410,-680) 470,-620 v1(494.5,-620)
  Bottom Layer w7: v1(410,-680) 410,-899.1 430.9,-920 U2.9
  Bottom Layer w10: v1(494.5,-620) 587.5,-527 587.5,-508.65 665,-431.15 815.02,-431.15 923,-323.17 923,236.64 821.55,338.08 Q2.1 ; U2.9@641.26,-933.78 U2.9
PWM_R: Q1.1 U2.8 | length 2331.9
  Top Layer w7: v1(392.5,-650) 461.6,-580.9 489.1,-580.9 v1(490,-580)
  Bottom Layer w7: v1(392.5,-650) 375,-667.5 375,-890 450,-965 655,-965 660.95,-959.05 U2.8
  Bottom Layer w10: v1(490,-580) 490,-576.31 652.16,-414.15 807.98,-414.15 906,-316.12 906,229.59 828.59,307 707.04,307 665,349.04 Q1.1
RCLK: U2.7 U5.12 U6.12 U7.12 U8.12 | length 3491.3
  Top Layer w7: v1(-730.34,440) -715,424.66 -715,-737.01 -597.01,-855 v1(-535,-855) v1(-302.09,-855)
  Top Layer w10: v1(-995,440) v1(-730.34,440)
  Bottom Layer w7: U8.12 v1(-535,-855) ; U7.12 v1(-302.09,-855) -125.94,-855 -90,-890.94 -90,-965 -55,-1000 655,-1000 680.63,-974.37 U2.7
  Bottom Layer w10: U5.12 v1(-995,440) ; v1(-730.34,440) -729.41,439.07 U6.12
RNG0: D17.COM U7.4 | length 1660.3
  Top Layer w7: v1(-75,-637.69) -75,-370 -135,-310 -135,515 -108.17,541.83 -83.01,541.83 -49.84,575 D17.COM
  Bottom Layer w7: U7.4 -327.68,-617.68 -310,-600 -112.69,-600 v1(-75,-637.69)
RNG1: D18.COM U7.5 | length 2086.2
  Top Layer w7: v1(-80,-670) -97.31,-652.69 -97.31,-592.62 -89,-584.31 -89,-375.8 -149,-315.8 -149,520.8 -100,569.8 -100,610 -75,635 85,635 195.08,524.92 250.08,524.92 D18.COM
  Bottom Layer w7: U7.5 -302.09,-629.59 -286.5,-614 -160,-614 -118.49,-614 -100.44,-632.05 -100.44,-649.56 v1(-80,-670)
RNG2: D19.COM U7.6 | length 2532.7
  Top Layer w7: v1(-57.68,-695) -86.55,-695 -111.31,-670.24 -111.31,-580.9 -103,-572.59 -103,-381.6 -163,-321.6 -163,526.6 -114,575.6 -114,615.8 -80.8,649 90.8,649 154.8,585 324.92,585 385,524.92 385,415.84 476.39,324.46 D19.COM
  Bottom Layer w7: U7.6 -276.5,-649.5 -255,-628 -124.29,-628 -114.44,-637.85 -114.44,-655.81 -105,-665.24 -105,-676.55 -86.55,-695 v1(-57.68,-695)
RNG3: D20.COM U7.7 | length 2778.5
  Top Layer w7: v1(-115,-705) -112.9,-702.9 -112.9,-697.1 -125.31,-684.69 -125.31,-571.66 -117,-563.34 -117,-387.4 -177,-327.4 -177,532.4 -128,581.4 -128,621.6 -86.6,663 28,663 30,665 94.6,665 160.6,599 331,599 595,335 595,245 573.5,223.5 D20.COM
  Bottom Layer w7: U7.7 -250.91,-657.91 -235,-642 -178,-642 v1(-115,-705)
RNG4: D21.COM U8.15 | length 1996.6
  Top Layer w7: v1(-105,-65) 94.6,-65 194.6,-165 431.41,-165 D21.COM
  Bottom Layer w7: U8.15 -611.77,-793.23 -665,-740 -665,-450.2 -609.8,-395 -395,-395 -325,-325 -325,-259.39 -130.61,-65 v1(-105,-65)
RNG5: D22.COM U8.1 | length 1691.6
  Top Layer w7: v1(-75,-89.75) 99.55,-89.75 215,-205.2 215,-410 245,-440 286.53,-440 D22.COM
  Bottom Layer w7: U8.1 -640,-702.36 -640,-445 -604,-409 -389.2,-409 -311,-330.8 -311,-265.19 -135.55,-89.75 v1(-75,-89.75)
RNG6: D23.COM U8.2 | length 1707.9
  Top Layer w7: v1(-105,-115) 105,-115 170,-180 170,-315 40,-445 D23.COM
  Bottom Layer w7: U8.2 -611.77,-619.23 -626,-605 -626,-450.8 -598.2,-423 -383.4,-423 -297,-336.6 -297,-270.99 -141.01,-115 v1(-105,-115)
RNG7: D24.COM U8.3 | length 812.9
  Top Layer w7: v1(-250.91,-365) -252.54,-366.63 -252.54,-514.44 D24.COM
  Bottom Layer w7: U8.3 -586.18,-620.82 -612,-595 -612,-456.6 -592.4,-437 -377.6,-437 -305.6,-365 v1(-250.91,-365)
RNG8: D25.COM U8.4 | length 423.2
  Top Layer w7: v1(-565,-510) -565,-457.15 -470.08,-362.23 -470.08,-329.92 D25.COM
  Bottom Layer w7: v1(-565,-510) -560.59,-514.41 U8.4
RNG9: D26.COM U8.5 | length 859
  Top Layer w7: D26.COM -575,-110 -565,-120 -431.77,-120 -415,-136.77 -415,-280 -415,-326.95 -535,-446.95 v1(-535,-545)
  Bottom Layer w7: U8.5 v1(-535,-545)
RNG10: D27.COM U8.6 | length 1131.9
  Top Layer w7: D27.COM -524.25,245.08 -524.25,-25.75 -505,-45 -400,-45 -380,-65 -380,-311.75 -507.85,-439.6 v1(-507.85,-514.14)
  Bottom Layer w7: U8.6 -508.63,-704.22 -508.63,-514.92 v1(-507.85,-514.14)
RNG11: D28.COM U8.7 | length 1252.4
  Top Layer w7: v1(-485,-546.34) -485,-436.55 -365,-316.55 -365,437.36 -325.2,477.16 D28.COM
  Bottom Layer w7: v1(-485,-546.34) -485,-703.82 U8.7
RNGBLUE: Q6.3 RP19.1 RP19.2 RP19.3 RP19.4 RP20.1 RP20.2 RP20.3 RP20.4 RP21.1 RP21.2 RP21.3 RP21.4 | length 3440.4
  Top Layer w15: v1(480,100) 479,99 479,-121.77 498.23,-141 677.89,-141 700,-118.89 v1(700,205)
  Bottom Layer w15: RP21.1 RP21.2 RP21.3 RP21.4 -395,-24.06 -365,5.94 -365,164.79 -343,186.79 -343,328.5 -315,356.5 -51.5,356.5 5,300 117.83,300 202.83,215 345.41,215 363.92,196.5 RP19.1 376.75,196.5 392.5,180.75 RP19.2 398.22,180.25 404.3,180.25 419.55,165 RP19.3 430.22,165 445.97,149.25 RP19.4 453.36,149.25 480,122.61 v1(480,100) ; RP20.4 -96.39,-386.85 -74.12,-386.85 RP20.3 -66.57,-379.3 -45,-379.3 -40.7,-375 RP20.2 -36.31,-371.31 -14.04,-371.31 RP20.1 -7.49,-366.85 74.36,-285 170.3,-285 238.37,-216.93 269.09,-216.93 381.02,-105 490,-105 530,-145 610,-145 670,-85 670,147 697.5,174.5 697.5,181.5 708,192 Q6.3
RNGGRN: Q5.3 RP16.1 RP16.2 RP16.3 RP16.4 RP17.1 RP17.2 RP17.3 RP17.4 RP18.1 RP18.2 RP18.3 RP18.4 | length 2100.9
  Top Layer w15: v1(130,365) 130,255 215,170 295,170 435,30 435,-140 480,-185 v1(735,-185)
  Bottom Layer w15: RP18.1 RP18.2 RP18.3 RP18.4 -395,385 -368.5,411.5 RP16.1@-19.04,411.5 ; RP16.1 -3.25,411.5 12.5,395.75 RP16.2 18.22,395.25 24.3,395.25 39.55,380 RP16.3 50.22,380 65.97,364.25 RP16.4 73.53,363 128,363 v1(130,365) ; RP17.4 88.19,-340 110.46,-340 RP17.3 118.01,-332.45 139.58,-332.45 143.88,-328.15 RP17.2 148.27,-324.46 170.54,-324.46 RP17.1 177.09,-320 247.09,-250 291.08,-250 401.08,-140 v1(429.22,-140)
RNGRED: Q4.3 RP13.1 RP13.2 RP13.3 RP13.4 RP14.1 RP14.2 RP14.3 RP14.4 RP15.1 RP15.2 RP15.3 RP15.4 | length 2532.2
  Top Layer w15: v1(300,250) 300,205 370.56,134.44 370.56,125.56 457,39.11 457,-130.89 489.11,-163 687,-163 735,-115 v1(735,15)
  Bottom Layer w15: RP15.1 RP15.2 RP15.3 RP15.4 -394.96,165.94 -365,195.91 -365,363 -348,380 -29.55,380 20.45,330 149.81,330 177.87,301.94 RP13.1 185.26,301.94 201,286.2 RP13.2 206.72,285.7 212.8,285.7 228.05,270.45 RP13.3 238.73,270.45 254.48,254.7 RP13.4 262.75,252.73 297.27,252.73 v1(300,250) ; RP14.4 277.15,-286 299.42,-286 RP14.3 306.97,-278.45 328.54,-278.45 332.84,-274.15 RP14.2 337.23,-270.46 359.5,-270.46 RP14.1 366.05,-266 432.05,-200 605,-200 715,-90 Q4.3
SCL: U2.23 U4.6 | length 1248
  Bottom Layer w10: U2.23 720,-610.64 767.64,-563 892.96,-563 957,-498.96 957,182.08 995,220.08 1059.92,220.08 1075,205 U4.6
SCLK: U2.12 U5.11 U6.11 U7.11 U8.11 | length 3602.5
  Top Layer w7: v1(-703.82,465) -701,462.18 -701,-724 -595.32,-829.68 v1(-510,-829.68) -295,-829.68 -276.5,-848.19 v1(-276.5,-880) -190,-880 -173,-897 -173,-980 -152,-1001 449,-1001 470,-980 470,-825.63 485.63,-810 v1(510,-810)
  Top Layer w10: v1(-967.39,465) v1(-703.82,465)
  Bottom Layer w7: v1(-510,-829.68) -509.7,-829.98 -509.7,-964.7 U8.11 ; U7.11 v1(-276.5,-880) ; v1(510,-810) 541.26,-841.26 U2.12
  Bottom Layer w10: U5.11 -968.69,335.72 -968.69,463.71 v1(-967.39,465) ; U6.11 v1(-703.82,465)
SDA: U2.24 U4.5 | length 1030.3
  Bottom Layer w10: U2.24 739.68,-615 774.68,-580 900,-580 974,-506 974,118.44 990,134.44 U4.5
SWCLK: P2.1 U2.28 | length 627
  Bottom Layer w10: U2.28 838.11,-640.89 865,-614 946,-614 1095,-465 P2.1
SWDIO: P2.2 U2.25 | length 715.6
  Bottom Layer w10: U2.25 759.37,-627.63 790,-597 938,-597 1170,-365 P2.2
VBUS: C5.2 J1.A4 J1.A9 J1.B4 J1.B9 U3.3 | length 490.6
  Bottom Layer w20: U3.3 U3.3@-1059.45,-835 ; J1.A9 J1.B4 -1055.61,-690.69 -1055.61,-704.39 -1025,-735 -1025,-829.68 ; C5.2 -950,-743.15 J1.B9 J1.A4
  Bottom Layer w50: U3.3@-1059.45,-835 -1054.13,-829.68 -1025,-829.68 C5.2
VCC: C1.2 C2.2 C3.2 C4.2 C6.2 D29.1 P2.3 R1.2 U2.1 U2.6 U2.19 U2.27 U3.2 U4.8 U5.10 U5.16 U6.10 U6.16 U7.10 U7.16 U8.10 U8.16 | length 7345
  Top Layer w15: v1(-1115,-10) D29.1
  Top Layer w30: v2@-352.69,-1085 v2(-345,-1085) v2(-315,-1085) v2(-285,-1085) v2(-255,-1085) 805,-1085 ; 640,-742.57 640,-850 670,-880 v1(700,-880) ; C1.2@657.57,-725 787.43,-725 805,-742.57 805,-1085 ; P2.3 1240,-335 1240,-525 1320,-605 1320,-860 1095,-1085 v2(975,-1085) v2(946,-1085) 805,-1085
  Bottom Layer w10: U2.19 641.26,-721.26 v1(645,-725) ; v1(700,-880) 700,-884.68 700.32,-885 U2.6 ; v1(793.17,-880) 793.17,-883.17 797.83,-887.83 797.83,-919.09 U2.1 ; v1(797,-725) 798.74,-723.26 U2.27
  Bottom Layer w15: U3.2@-1150,-840.51 -1160,-830.51 -1160,-10 ; v1(-1115,-10) -1160,-10 ; U5.16 -1097.36,272.36 -1095,270 ; U5.10 -943.82,271.18 -945,270 ; U6.16 -831.77,271.77 -830,270 ; U6.10 -678.84,334.39 -678.84,291.16 -700,270 -830,270 ; -640,-1079.68 -637.36,-1077.05 U8.16 ; -490,-1079.68 -483.82,-1073.5 U8.10 ; -405,-1079.68 -404.45,-1079.13 U7.16 ; U7.10 -250.91,-1078.78 v2@-250,-1079.68 ; -1160,-10 -1160,224.55 -1114.55,270 -1095,270 ; -1095,270 -945,270 ; -945,270 -830,270
  Bottom Layer w20: U4.8 1175,106.44 1220,61.44 1220,-245 1240,-265 P2.3
  Bottom Layer w50: U3.2@-1150,-840.51 -1150,-1068.86 -1144.17,-1074.68 -955,-1074.68 C6.2 -640,-1079.68 -490,-1079.68 -405,-1079.68 v2@-250,-1079.68
X1: C7.2 U2.2 Y1.1 | length 531.5
  Bottom Layer w10: U2.2 779.05,-955.5 783.55,-960 930,-960 955,-935 955,-854.84 1018.9,-790.94 1018.9,-785.04 1039.49,-764.45 Y1.1 1045.39,-674.61 C7.2
X2: C8.2 U2.3 Y1.2 | length 650.6
  Bottom Layer w10: U2.3 759.37,-959.86 779.51,-980 1050,-980 1175,-855 Y1.2 C8.2
pads on no net: J1.A5 J1.A6 J1.A7 J1.B5 J1.B6 J1.B7 P3.0 U1.0 U2.13 U2.29 U2.31 U2.32 U4.1 U6.9 Y1.3 Y1.4

## Polygon pours and split planes (outlines as drawn)
GND on Top Layer "GND_L01_P000" (solid, remove dead copper, pour order 0): -1380,1185 -1380,-1180 1375,-1180 1380,-1175 1375,-1170 1375,1185
GND on Bottom Layer (solid, remove dead copper, pour order 2): -1380,1185 -1380,-1185 -1375,-1180 1380,-1180 1380,1190

## Silkscreen, mask and mechanical layers (free items; w line width, h text height)
Top Overlay:
  circle w10: c2519.69,0 r590.55
  lines w10: 1929.69,0 3110.24,0 ; 2012.36,-292.83 3029.69,295 ; 2013.2,292.43 3031.33,-295.41 ; 2222.93,513.98 2814.02,-509.8 ; 2227.23,-506.53 2812.48,507.11 ; 2519.69,-585.41 2519.68,595
  text "GND" at 1115,-185 h47.24
  text "3.3V" at 1075,-285 h47.24
  text "IO" at 1170,-390 h47.24
  text "CLK" at 1115,-490 h47.24
Mechanical 1:
  the board outline again, w10